# EAGLE board MPC_celltesterV1.0 (EAGLE 9.6.2)
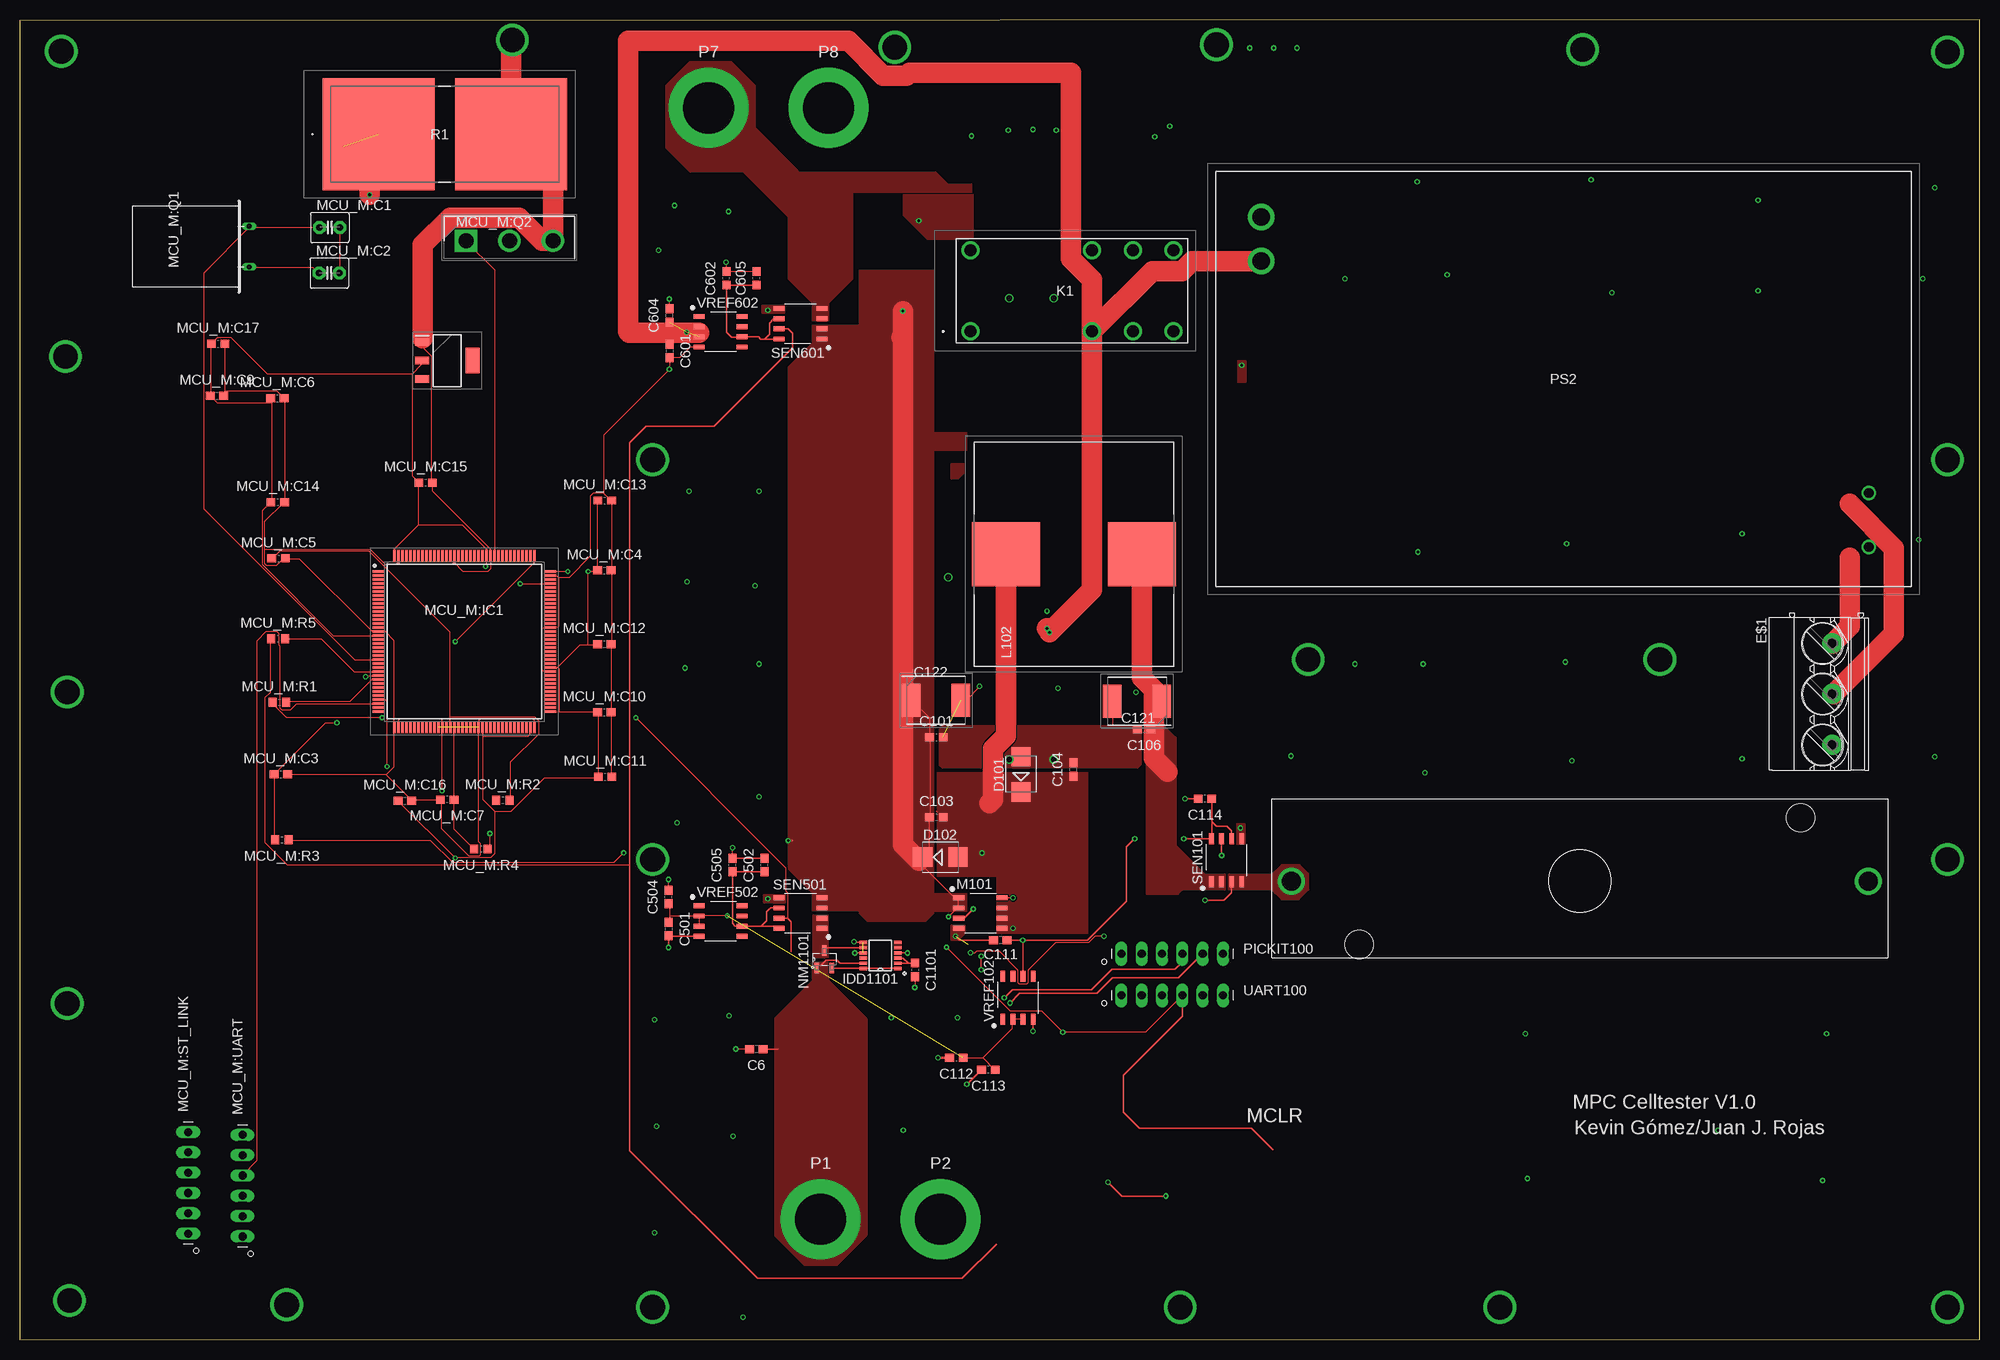
[diagram p0: board, top side]
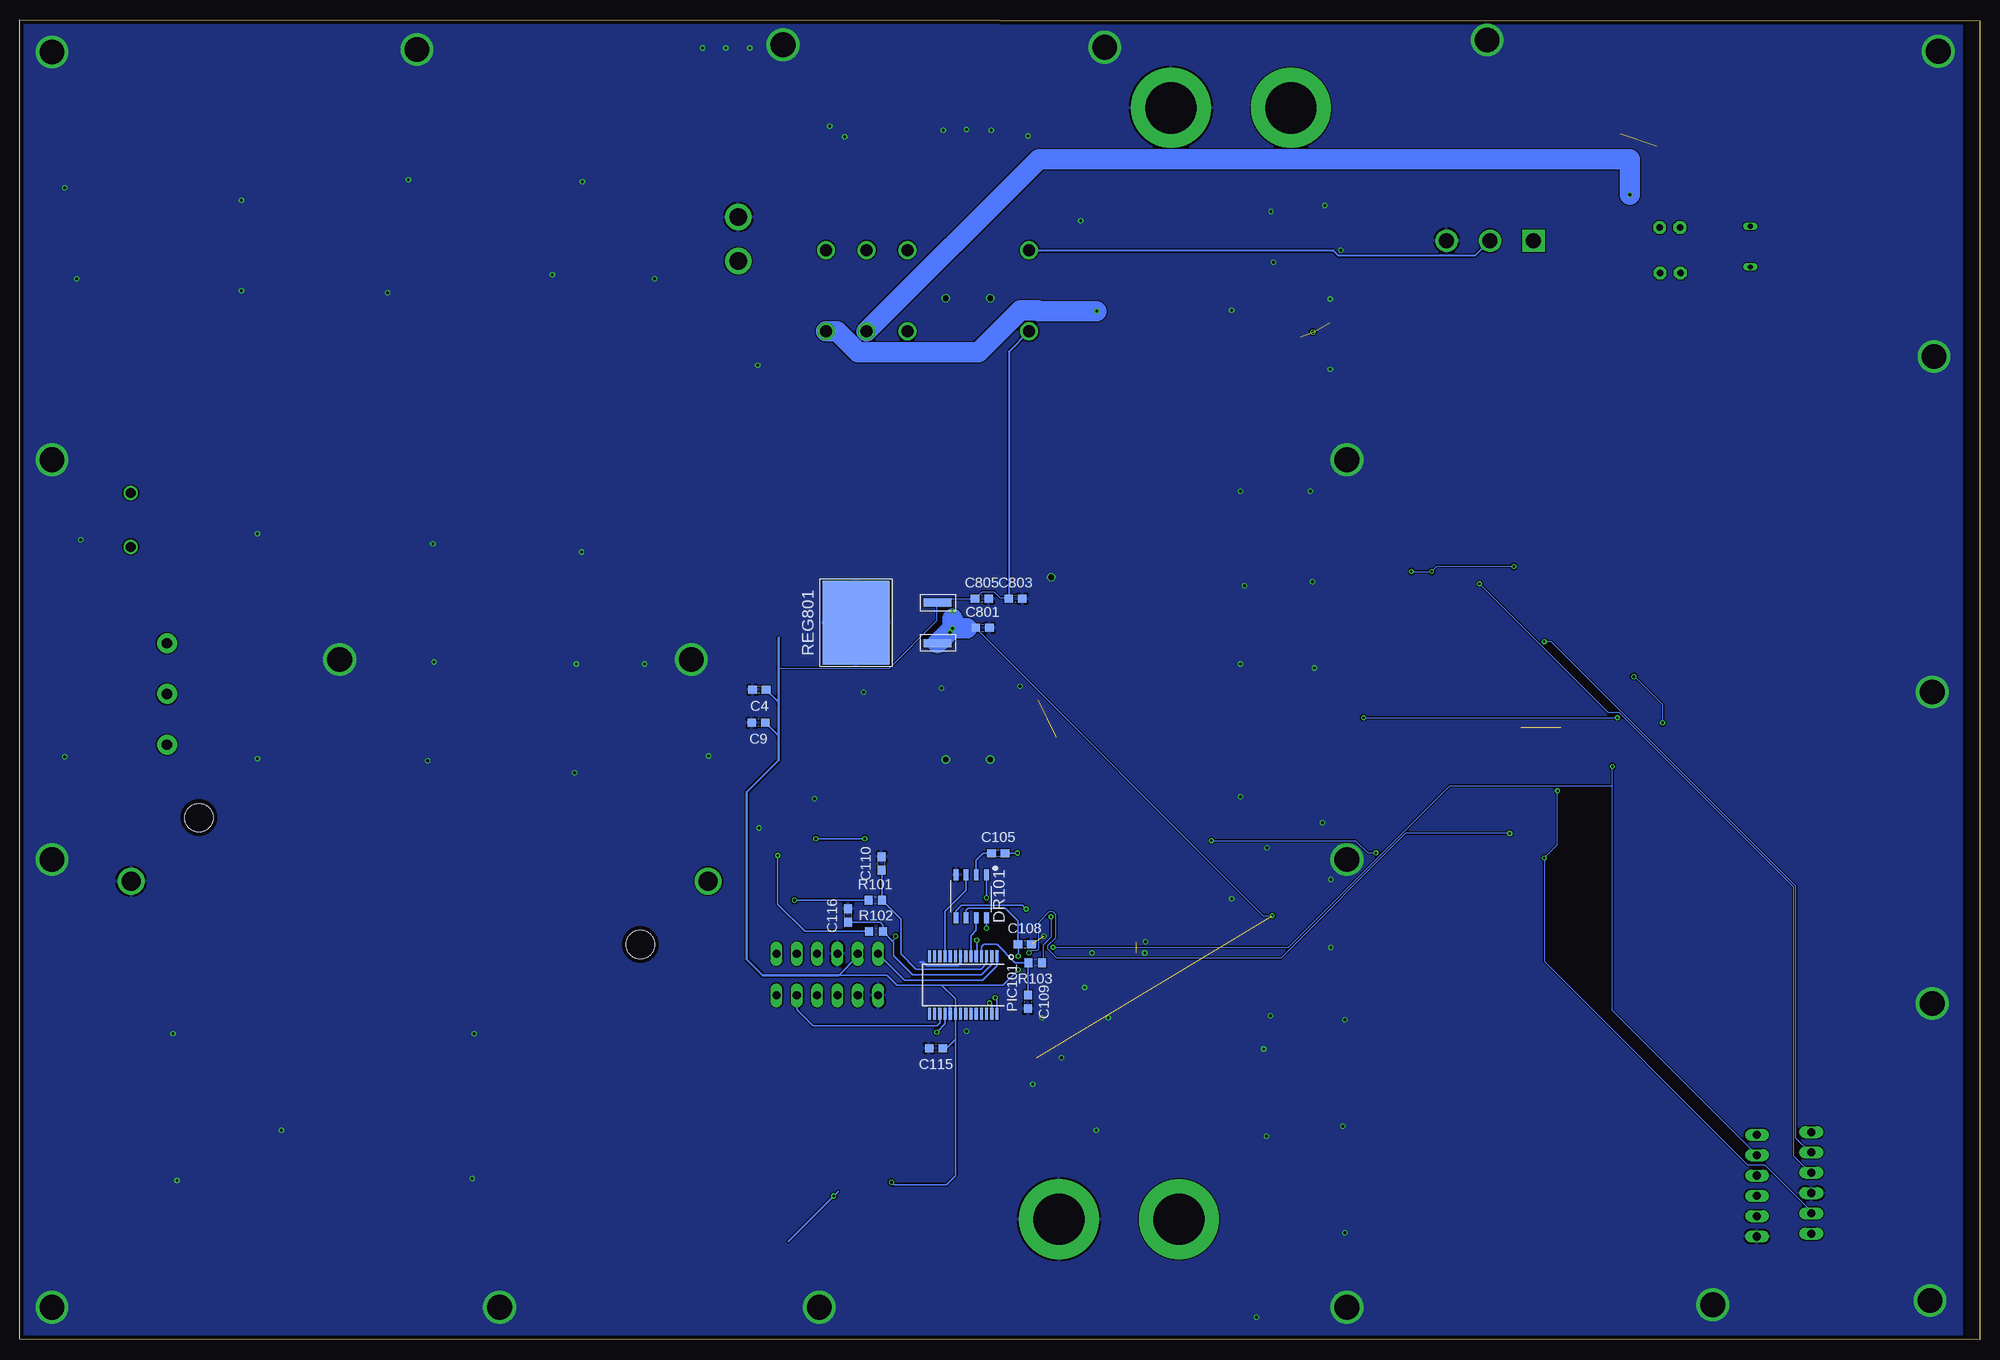
[diagram p1: board, bottom side, seen from below]

Size 245.15 x 165.1 mm. Coordinates in mm from the lower left corner, seen from the top.
Outline: 0,0 245.15,0.1 245.15,165.1 0,165 0,0
Copper layers (1*16): Top 0.035mm / dielectric 1.53mm / Bottom 0.035mm
Design rules "pban_5mil-l2": minimum track width 5mil, minimum drill 0.3mm, track to track 5mil, track to pad 0.229mm, pad to pad 5mil, via to via 5mil, smd to smd 5mil, copper to edge 0.5mm, drill to drill 0.5mm, minimum pad ring 0.15mm, minimum via ring 0.15mm, stop-mask expansion 4mil, vias tented up to drill 0.35mm, thermal gap 10mil

## Footprints (pad centres in the part's own frame; a part is rotated, then mirrored left to right if it is on the bottom)
C0603 = smd 1.1 x 1: 1 -0.85,0; 2 0.85,0
CAPPM7360X430N = smd 2.35 x 4.15: 1 -3.1,0; 2 3.1,0
18650_HOLDER = drill 2.38: BB1.N 36.11,0; BB1.P -36.11,0 | hole 3.55: 27.6,7.935; -27.6,-7.935
SMB = smd 2.4 x 2.4: A 2.2,0; C -2.2,0
SOIC-8 = smd 0.6 x 1.4: 1 -1.905,-2.7; 2 -0.635,-2.7; 3 0.635,-2.7; 4 1.905,-2.7; 5 1.905,2.7; 6 0.635,2.7; 7 -0.635,2.7; 8 -1.905,2.7
MKDS_5/3-635 = drill 1.3 pad 2.5: 1 -6.35,0; 2 0,0; 3 6.35,0
MSOP12 = smd 0.9 x 0.42: 1 -2.163,1.625; 2 -2.163,0.975; 3 -2.163,0.325; 4 -2.163,-0.325; 5 -2.163,-0.975; 6 -2.163,-1.625; 7 2.15,-1.625; 8 2.15,-0.975; 9 2.15,-0.325; 10 2.15,0.325; 11 2.15,0.975; 12 2.15,1.625
ADJ56005 = drill 1.5 pad 2.25: 1 0,0; 2 15.24,0; 3 20.32,0; 4 25.4,0; 5 25.4,10.16; 6 20.32,10.16; 7 15.24,10.16; 8 0,10.16
74437529203221 = smd 8 x 8.5: 1 0,8.5; 2 0,-8.5
C2.5-4 = drill 0.813 pad 1.6 octagon: 1 -1.27,0; 2 1.27,0
QFP50P2200X2200X160-144N = smd 1.475 x 0.3: 1 -10.738,8.75; 2 -10.738,8.25; 3 -10.738,7.75; 4 -10.738,7.25; 5 -10.738,6.75; 6 -10.738,6.25; 7 -10.738,5.75; 8 -10.738,5.25; 9 -10.738,4.75; 10 -10.738,4.25; 11 -10.738,3.75; 12 -10.738,3.25; 13 -10.738,2.75; 14 -10.738,2.25; 15 -10.738,1.75; 16 -10.738,1.25; 17 -10.738,0.75; 18 -10.738,0.25; 19 -10.738,-0.25; 20 -10.738,-0.75; 21 -10.738,-1.25; 22 -10.738,-1.75; 23 -10.738,-2.25; 24 -10.738,-2.75; 25 -10.738,-3.25; 26 -10.738,-3.75; 27 -10.738,-4.25; 28 -10.738,-4.75; 29 -10.738,-5.25; 30 -10.738,-5.75; 31 -10.738,-6.25; 32 -10.738,-6.75; 33 -10.738,-7.25; 34 -10.738,-7.75; 35 -10.738,-8.25; 36 -10.738,-8.75; 73 10.738,-8.75; 74 10.738,-8.25; 75 10.738,-7.75; 76 10.738,-7.25; 77 10.738,-6.75; 78 10.738,-6.25; 79 10.738,-5.75; 80 10.738,-5.25; 81 10.738,-4.75; 82 10.738,-4.25; 83 10.738,-3.75; 84 10.738,-3.25; 85 10.738,-2.75; 86 10.738,-2.25; 87 10.738,-1.75; 88 10.738,-1.25; 89 10.738,-0.75; 90 10.738,-0.25; 91 10.738,0.25; 92 10.738,0.75; 93 10.738,1.25; 94 10.738,1.75; 95 10.738,2.25; 96 10.738,2.75; 97 10.738,3.25; 98 10.738,3.75; 99 10.738,4.25; 100 10.738,4.75; 101 10.738,5.25; 102 10.738,5.75; 103 10.738,6.25; 104 10.738,6.75; 105 10.738,7.25; 106 10.738,7.75; 107 10.738,8.25; 108 10.738,8.75 | smd 0.3 x 1.475: 37 -8.75,-10.738; 38 -8.25,-10.738; 39 -7.75,-10.738; 40 -7.25,-10.738; 41 -6.75,-10.738; 42 -6.25,-10.738; 43 -5.75,-10.738; 44 -5.25,-10.738; 45 -4.75,-10.738; 46 -4.25,-10.738; 47 -3.75,-10.738; 48 -3.25,-10.738; 49 -2.75,-10.738; 50 -2.25,-10.738; 51 -1.75,-10.738; 52 -1.25,-10.738; 53 -0.75,-10.738; 54 -0.25,-10.738; 55 0.25,-10.738; 56 0.75,-10.738; 57 1.25,-10.738; 58 1.75,-10.738; 59 2.25,-10.738; 60 2.75,-10.738; 61 3.25,-10.738; 62 3.75,-10.738; 63 4.25,-10.738; 64 4.75,-10.738; 65 5.25,-10.738; 66 5.75,-10.738; 67 6.25,-10.738; 68 6.75,-10.738; 69 7.25,-10.738; 70 7.75,-10.738; 71 8.25,-10.738; 72 8.75,-10.738; 109 8.75,10.738; 110 8.25,10.738; 111 7.75,10.738; 112 7.25,10.738; 113 6.75,10.738; 114 6.25,10.738; 115 5.75,10.738; 116 5.25,10.738; 117 4.75,10.738; 118 4.25,10.738; 119 3.75,10.738; 120 3.25,10.738; 121 2.75,10.738; 122 2.25,10.738; 123 1.75,10.738; 124 1.25,10.738; 125 0.75,10.738; 126 0.25,10.738; 127 -0.25,10.738; 128 -0.75,10.738; 129 -1.25,10.738; 130 -1.75,10.738; 131 -2.25,10.738; 132 -2.75,10.738; 133 -3.25,10.738; 134 -3.75,10.738; 135 -4.25,10.738; 136 -4.75,10.738; 137 -5.25,10.738; 138 -5.75,10.738; 139 -6.25,10.738; 140 -6.75,10.738; 141 -7.25,10.738; 142 -7.75,10.738; 143 -8.25,10.738; 144 -8.75,10.738
SOT230P700X180-4N = smd 1.75 x 0.95: 1 -3.15,2.3; 2 -3.15,0; 3 -3.15,-2.3 | smd 1.75 x 3.2: 4 3.15,0
Q = drill 0.61 long: 1 -2.54,-7.62; 2 2.54,-7.62
TO544P530X1590X2600-3P = drill 1.86 pad 2.79 square: 1 0,0 | drill 1.86 pad 2.79: 2 5.44,0; 3 10.88,0
R0603 = smd 1 x 1.1: 1 -0.85,0; 2 0.85,0
MA06-1 = drill 1.016 long: 1 -6.35,0; 2 -3.81,0; 3 -1.27,0; 4 1.27,0; 5 3.81,0; 6 6.35,0
SOT-23 = smd 1.321 x 0.559: 1 -1.092,0.94; 2 -1.092,-0.94; 3 1.092,0
TJ-563 = drill 6.4 pad 10: P 0,0
SSOP28 = smd 0.4 x 1.5: 1 -4.225,-3.625; 2 -3.575,-3.625; 3 -2.925,-3.625; 4 -2.275,-3.625; 5 -1.625,-3.625; 6 -0.975,-3.625; 7 -0.325,-3.625; 8 0.325,-3.625; 9 0.975,-3.625; 10 1.625,-3.625; 11 2.275,-3.625; 12 2.925,-3.625; 13 3.575,-3.625; 14 4.225,-3.625; 15 4.225,3.625; 16 3.575,3.625; 17 2.925,3.625; 18 2.275,3.625; 19 1.625,3.625; 20 0.975,3.625; 21 0.325,3.625; 22 -0.325,3.625; 23 -0.975,3.625; 24 -1.625,3.625; 25 -2.275,3.625; 26 -2.925,3.625; 27 -3.575,3.625; 28 -4.225,3.625
MPM9012 = drill 1.2 pad 1.8: 1 0,0; 2 0,-6.75 | drill 2.2 pad 3.3: 3 76,-41.25; 4 76,-35.75
RWS108K2JTR = smd 14 x 14: 1 -8.3,0; 2 8.3,0
D2PAK-3 = smd 1.016 x 3.504: 1 -2.54,-10.213; 3 2.54,-10.213 | smd 10.49 x 8.38: 4 0,0

## Placement (x,y rotation side)
C4  0.1u  [C0603]  152.65,81.3 180 bottom
C6  1u  [C0603]  92.13,36.38 180 top
C9  10u  [C0603]  152.75,77.2 180 bottom
C101  1u  [C0603]  114.65,75.4 0 top
C103  1n  [C0603]  114.65,65.4 0 top
C104  1n  [C0603]  131.8,71.35 90 top
C105  1u  [C0603]  122.75,60.9 0 bottom
C106  1u  [C0603]  140.65,76.4 180 top
C108  2.2u  [C0603]  119.45,49.5 0 bottom
C109  0.1u  [C0603]  119.05,42.3 270 bottom
C110  0.1u  [C0603]  137.35,59.6 90 bottom
C111  1u  [C0603]  122.65,50 180 top
C112  10u  [C0603]  117.15,35.3 180 top
C113  1u  [C0603]  121.15,33.8 180 top
C114  0.1u  [C0603]  148.25,67.7 180 top
C115  0.1u  [C0603]  130.55,36.5 180 bottom
C116  1n  [C0603]  141.55,53.1 90 bottom
C121  T543O477M016AHE020  [CAPPM7360X430N]  139.75,79.9 180 top
C122  T543O477M016AHE020  [CAPPM7360X430N]  114.6,80 0 top
C501  10u  [C0603]  81.15,51.4 270 top
C502  1u  [C0603]  93.15,59.4 90 top
C504  1u  [C0603]  81.15,55.4 90 top
C505  0.1u  [C0603]  89.15,59.4 90 top
C601  10u  [C0603]  81.25,123.7 270 top
C602  1u  [C0603]  88.37,132.8 90 top
C604  1u  [C0603]  81.27,128.15 90 top
C605  0.1u  [C0603]  92.17,132.8 90 top
C801  0.33u  [C0603]  124.72,89.06 0 bottom
C803  1u  [C0603]  120.61,92.73 0 bottom
C805  10u  [C0603]  124.81,92.73 0 bottom
C1101  0.1u  [C0603]  111.95,46.3 270 top
CELL1  CELL18650_HOLDER  [18650_HOLDER]  195.15,57.4 0 top
D101  [SMB]  125.25,70.75 90 top
D102  [SMB]  115.15,60.4 0 top
DR101  TPS28225D  [SOIC-8]  126.15,55.5 180 bottom
E$1  [MKDS_5/3-635]  226.75,80.8 270 top
IDD1101  LTC4352CMS  [MSOP12]  107.65,48.1 180 top
K1  ADJ56005  [ADJ56005]  118.9,126.15 0 top
L102  74437529203471  [74437529203221]  131.85,98.3 90 top
M101  SI4914BDY  [SOIC-8]  120.15,53.4 270 top
MCU_M:C1  22pF  [C2.5-4]  38.75,139.15 0 top
MCU_M:C2  22pF  [C2.5-4]  38.7,133.45 0 top
MCU_M:C3  0.1u  [C0603]  32.65,70.75 0 top
MCU_M:C4  1u  [C0603]  73.1,96.25 0 top
MCU_M:C5  0.1u  [C0603]  32.35,97.75 0 top
MCU_M:C6  1u  [C0603]  32.2,117.8 0 top
MCU_M:C7  1n  [C0603]  53.45,67.6 180 top
MCU_M:C9  1u  [C0603]  24.65,118.1 0 top
MCU_M:C10  1u  [C0603]  73.1,78.5 0 top
MCU_M:C11  1u  [C0603]  73.2,70.45 0 top
MCU_M:C12  1u  [C0603]  73.1,87.05 0 top
MCU_M:C13  1u  [C0603]  73.15,105 0 top
MCU_M:C14  1u  [C0603]  32.25,104.8 0 top
MCU_M:C15  1u  [C0603]  50.75,107.25 0 top
MCU_M:C16  1u  [C0603]  48.15,67.45 0 top
MCU_M:C17  1u  [C0603]  24.8,124.6 0 top
MCU_M:IC1  STM32U575ZIT6Q  [QFP50P2200X2200X160-144N]  55.6,87.35 0 top
MCU_M:IC2  REG1117-3.3  [SOT230P700X180-4N]  53.45,122.5 0 top
MCU_M:Q1  [Q]  21.05,136.75 90 top
MCU_M:Q2  IMW65R083M1HXKSA1  [TO544P530X1590X2600-3P]  55.8,137.5 0 top
MCU_M:R1  0  [R0603]  32.45,79.75 0 top
MCU_M:R2  200  [R0603]  60.4,67.5 0 top
MCU_M:R3  200  [R0603]  32.75,62.55 180 top
MCU_M:R4  0  [R0603]  57.65,61.4 180 top
MCU_M:R5  0  [R0603]  32.3,87.7 0 top
MCU_M:ST_LINK  [MA06-1]  21.05,19.65 90 top
MCU_M:UART  [MA06-1]  27.85,19.3 90 top
NM1101  IRLML6244TRPBF  [SOT-23]  100.65,47.6 90 top
P1  TJ-563  [TJ-563]  100.15,15.1 0 top
P2  TJ-563  [TJ-563]  115.15,15.1 0 top
P7  TJ-563  [TJ-563]  86.15,154.1 0 top
P8  TJ-563  [TJ-563]  101.15,154.1 0 top
PIC101  PIC16F1786-I/SS  [SSOP28]  127.15,44.4 180 bottom
PICKIT100  [MA06-1]  144.15,48.3 0 top
PS2  MPM-90-12  [MPM9012]  231.3,99.2 180 top
R1  RWS10_8K2_J_T_R  [RWS108K2JTR]  53.15,150.8 0 top
R101  200  [R0603]  138.15,55 0 bottom
R102  0  [R0603]  138.05,51.1 0 bottom
R103  200  [R0603]  118.15,47.2 180 bottom
REG801  NCV7805BD2TG  [D2PAK-3]  140.56,89.7 90 bottom
SEN101  ACS723-05AB-T  [SOIC-8]  150.95,60 0 top
SEN501  ACS723-05AB-T  [SOIC-8]  97.65,53.4 90 top
SEN601  ACS723-05AB-T  [SOIC-8]  97.65,127.1 90 top
UART100  [MA06-1]  144.15,43.1 0 top
VREF102  REF195GSZ  [SOIC-8]  124.85,42.8 0 top
VREF502  REF195GSZ  [SOIC-8]  87.65,52.4 270 top
VREF602  REF195GSZ  [SOIC-8]  87.65,126.1 270 top

## Library data of the parts
C4 C6 C9 C101 C103-C106 C108-C116 C501 C502 C504 C505 C601 C602 C604 C605 C801 C803 C805 C1101 D101 D102 MCU_M:C3-MCU_M:C7 MCU_M:C9-MCU_M:C17 MCU_M:R1-MCU_M:R5 R101-R103 = Pasives
C121 C122 = T543O477M016AHE020; ARROW_PART_NUMBER: T543O477M016AHE020; ARROW_PRICE-STOCK: https://www.arrow.com/en/products/t543o477m016ahe020/kemet-corporation; DESCRIPTION: T543 HRA, Tantalum, Polymer Tantalum, HRA, 470 uF, 20%, 16 VDC, 105C, -55C, 105C, SMD, Polymer, Molded, Up Screening, 10 % , N/A, 20 mOhms, 752 uA, 696 mg, 7360, 4mm, Height Max = 4.3mm, 250, 52 Weeks; HEIGHT: 4.3mm; MANUFACTURER_NAME: KEMET; MANUFACTURER_PART_NUMBER: T543O477M016AHE020; MOUSER_PART_NUMBER: 80-T543O477M016AHE20; MOUSER_PRICE-STOCK: https://www.mouser.co.uk/ProductDetail/KEMET/T543O477M016AHE020/?qs=r5DSvlrkXmJq%252BXsyQPO%252BEg%3D%3D
CELL1 = Sources
DR101 IDD1101 M101 PIC101 REG801 SEN101 SEN501 SEN601 VREF102 VREF502 VREF602 = ICs
E$1 = con-phoenix-mkds_5
K1 = ADJ56005; ARROW_PART_NUMBER: ADJ56005; ARROW_PRICE-STOCK: https://www.arrow.com/en/products/adj56005/panasonic; DESCRIPTION: General Purpose Relays 2 Form C, 5VDC Single-Side-Stable; HEIGHT: 16.8mm; MANUFACTURER_NAME: Panasonic; MANUFACTURER_PART_NUMBER: ADJ56005; MOUSER_PART_NUMBER: 769-ADJ56005; MOUSER_PRICE-STOCK: https://www.mouser.co.uk/ProductDetail/Panasonic-Industrial-Devices/ADJ56005?qs=K19snyAz2PDLYPJLi5JsPw%3D%3D
L102 = 74437529203471; DESCRIPTION: WURTH ELEKTRONIK - 74437529203471 - Power Inductor (SMD), 470 H, 5.5 A, Shielded, 3.7 A, WE-HCF Series, 28mm x 25mm x 20.5mm; HEIGHT: 20.5mm; MANUFACTURER_NAME: Wurth Elektronik; MANUFACTURER_PART_NUMBER: 74437529203471; MOUSER_PART_NUMBER: 710-74437529203471; MOUSER_PRICE-STOCK: https://www.mouser.co.uk/ProductDetail/Wurth-Elektronik/74437529203471?qs=f9yNj16SXrIPviz1ofhdNA%3D%3D
MCU_M:C1 MCU_M:C2 = capacitor-wima
MCU_M:IC1 = STM32U575ZIT6Q; DESCRIPTION: ARM Microcontrollers - MCU Ultra-low-power FPU Arm Cortex-M33 Trust Zone, MCU 160 MHz 2Mbytes Flash memory; HEIGHT: 1.6mm; MANUFACTURER_NAME: STMicroelectronics; MANUFACTURER_PART_NUMBER: STM32U575ZIT6Q; MOUSER_PART_NUMBER: 511-STM32U575ZIT6Q; MOUSER_PRICE-STOCK: https://www.mouser.co.uk/ProductDetail/STMicroelectronics/STM32U575ZIT6Q?qs=DRkmTr78QAQiyS5FForRwQ%3D%3D
MCU_M:IC2 = REG1117-3.3; ARROW_PART_NUMBER: REG1117-3.3; ARROW_PRICE-STOCK: https://www.arrow.com/en/products/reg1117-3.3/texas-instruments?region=nac; DESCRIPTION: 800mA,3.3V,LDO Voltage Reg.,REG1117-3.3 Texas Instruments REG1117-3.3, LDO Voltage Regulator, 0.8A, 3.3 V +/-1%, 3.8 15 Vin, 4-Pin SOT-223; HEIGHT: 1.8mm; MANUFACTURER_NAME: Texas Instruments; MANUFACTURER_PART_NUMBER: REG1117-3.3; MOUSER_PART_NUMBER: 595-REG1117-3.3; MOUSER_PRICE-STOCK: https://www.mouser.co.uk/ProductDetail/Texas-Instruments/REG1117-3.3?qs=sSOk4GDDv7y9bL0tER%2FZXw%3D%3D
MCU_M:Q1 = special
MCU_M:Q2 = IMW65R083M1HXKSA1; DESCRIPTION: CoolSiC MOSFET 650V SiC MOSFET delivering reliable and cost-effective performance in TO247 3pin package; HEIGHT: 5.3mm; MANUFACTURER_NAME: Infineon; MANUFACTURER_PART_NUMBER: IMW65R083M1HXKSA1; MOUSER_PART_NUMBER: 726-IMW65R083M1HXKSA; MOUSER_PRICE-STOCK: https://www.mouser.co.uk/ProductDetail/Infineon-Technologies/IMW65R083M1HXKSA1?qs=iLbezkQI%252Bshnhe4LfuFU5w%3D%3D
MCU_M:ST_LINK MCU_M:UART PICKIT100 UART100 = Interfaces; OC_FARNELL: unknown; OC_NEWARK: unknown
NM1101 = ICs; RS_SN: 737-7228
P1 P2 P7 P8 = Interfaces
PS2 = MPM-90-12; ARROW_PART_NUMBER: MPM-90-12; ARROW_PRICE-STOCK: https://www.arrow.com/en/products/mpm-90-12/mean-well-enterprises; DESCRIPTION: AC/DC Power Modules 80.4W 12V 6.7A PCB Mnt Medical; HEIGHT: 29.5mm; MANUFACTURER_NAME: Mean Well; MANUFACTURER_PART_NUMBER: MPM-90-12; MOUSER_PART_NUMBER: 709-MPM-90-12; MOUSER_PRICE-STOCK: https://www.mouser.co.uk/ProductDetail/MEAN-WELL/MPM-90-12?qs=GBLSl2AkirsaepJLNG9d8w%3D%3D
R1 = RWS10_8K2_J_T&R; DESCRIPTION: Precision Power Wirewound SMD Resistors; HEIGHT: 13mm; MANUFACTURER_NAME: Arcol; MANUFACTURER_PART_NUMBER: RWS10 8K2 J T&R

## Nets
+5V: C4.1 C9.1 C108.1 C115.1 C803.1 C805.1 DR101.6 K1.1 PIC101.20 PICKIT100.2 REG801.3
+12V: C112.1 C113.1 C501.1 C504.1 C601.1 C604.1 C801.1 K1.2 PS2.4 REG801.1 VREF102.2 VREF102.3 VREF502.2 VREF502.3 VREF602.2 VREF602.3
COM_RX: MCU_M:IC1.33 MCU_M:UART.5 PIC101.18 UART100.4
GND: C4.2 C6.2 C9.2 C101.2 C104.2 C106.2 C108.2 C109.2 C110.2 C111.2 C112.2 C113.2 C114.2 C115.2 C116.2 C121.2 C122.2 C501.2 C502.2 C504.2 C505.2 C601.2 C602.2 C604.2 C605.2 C801.2 C803.2 C805.2 C1101.2 CELL1.BB1.N D101.A DR101.4 IDD1101.4 IDD1101.7 IDD1101.9 M101.4 MCU_M:C3.2 MCU_M:C4.2 MCU_M:C5.2 MCU_M:C6.2 MCU_M:C7.2 MCU_M:C9.2 MCU_M:C10.2 MCU_M:C11.2 MCU_M:C12.2 MCU_M:C13.2 MCU_M:C14.2 MCU_M:C15.2 MCU_M:C16.2 MCU_M:C17.2 MCU_M:IC1.16 MCU_M:IC1.37 MCU_M:IC1.48 MCU_M:IC1.58 MCU_M:IC1.72 MCU_M:IC1.83 MCU_M:IC1.94 MCU_M:IC1.107 MCU_M:IC1.120 MCU_M:IC1.129 MCU_M:IC1.143 MCU_M:IC2.1 MCU_M:Q2.3 MCU_M:ST_LINK.3 MCU_M:UART.1 P2.P P8.P PIC101.8 PIC101.19 PICKIT100.3 PS2.3 R1.2 REG801.4 SEN101.5 SEN501.5 SEN601.5 UART100.1 VREF102.4 VREF502.4 VREF602.4
I_BAT: R102.1 SEN101.7
IDEAL_D1:N$1: IDD1101.1 IDD1101.12 NM1101.2
IDEAL_D1:N$4: C1101.1 IDD1101.2 IDD1101.3
IS_LOAD: MCU_M:R5.1 SEN601.7
IS_PV: MCU_M:R1.1 SEN501.7
LOAD_BUS: P7.P SEN601.3 SEN601.4
MCU_M:3.3V_IN: MCU_M:C4.1 MCU_M:C6.1 MCU_M:C9.1 MCU_M:C10.1 MCU_M:C11.1 MCU_M:C12.1 MCU_M:C13.1 MCU_M:C14.1 MCU_M:C15.1 MCU_M:C16.1 MCU_M:C17.1 MCU_M:IC1.17 MCU_M:IC1.38 MCU_M:IC1.49 MCU_M:IC1.59 MCU_M:IC1.71 MCU_M:IC1.73 MCU_M:IC1.84 MCU_M:IC1.108 MCU_M:IC1.121 MCU_M:IC1.144 MCU_M:IC2.2 MCU_M:ST_LINK.2
MCU_M:+12V: MCU_M:IC2.3
MCU_M:BAT: MCU_M:R2.1
MCU_M:I_BAT: MCU_M:R4.1
MCU_M:I_LOAD: MCU_M:IC1.26 MCU_M:R5.2
MCU_M:I_PV: MCU_M:IC1.28 MCU_M:R1.2
MCU_M:IS_BATC: MCU_M:C7.1 MCU_M:IC1.52 MCU_M:R4.2
MCU_M:N$20: MCU_M:C1.1 MCU_M:IC1.23 MCU_M:Q1.2
MCU_M:N$21: MCU_M:C2.1 MCU_M:Q1.1
MCU_M:N$22: MCU_M:C1.2 MCU_M:C2.2
MCU_M:N$27: MCU_M:IC1.119 MCU_M:Q2.1
MCU_M:RX: MCU_M:IC1.34 MCU_M:UART.4
MCU_M:SW_CLK: MCU_M:IC1.109 MCU_M:ST_LINK.5
MCU_M:SW_DIO: MCU_M:IC1.105 MCU_M:ST_LINK.4
MCU_M:V_BUS: MCU_M:C3.1 MCU_M:IC1.27 MCU_M:R3.2
MCU_M:VS_BATC: MCU_M:C5.1 MCU_M:IC1.51 MCU_M:R2.2
MCU_S1:5V_REF: C111.1 C114.1 PIC101.5 SEN101.6 SEN101.8 VREF102.6
MCU_S1:DR_EN: DR101.7 PIC101.6
MCU_S1:G1: DR101.1 M101.8
MCU_S1:G2: DR101.5 M101.3
MCU_S1:ICSPCLK: PIC101.27 PICKIT100.5
MCU_S1:ICSPDAT: PIC101.28 PICKIT100.4
MCU_S1:IS_BAT: C116.1 PIC101.2 R102.2
MCU_S1:LO: C106.1 C121.1 L102.2 SEN101.1 SEN101.2
MCU_S1:MCLR: PIC101.1 PICKIT100.1
MCU_S1:N$2: C105.1 DR101.2
MCU_S1:PWM: DR101.3 PIC101.11
MCU_S1:SW: C103.2 C104.1 C105.2 D101.C D102.A DR101.8 L102.1 M101.5 M101.6 M101.7
MCU_S1:TX: PIC101.17 UART100.5
MCU_S1:VS_BAT: C110.1 PIC101.3 R101.2
MCU_S1:VS_BUS: C109.1 PIC101.4 R103.2
N$1: CELL1.BB1.P R101.1 SEN101.3 SEN101.4
N$2: K1.3 R1.1
N$6: IDD1101.8 NM1101.3 SEN501.1 SEN501.2
PV: C6.1 IDD1101.11 NM1101.1 P1.P
PV_BUS: C101.1 C103.1 C122.1 D102.C K1.4 M101.1 M101.2 MCU_M:R3.1 R103.1 SEN501.3 SEN501.4 SEN601.1 SEN601.2
SENS_LOAD:5V_REF: C602.1 C605.1 SEN601.6 SEN601.8 VREF602.6
SENS_PV:5V_REF: C502.1 C505.1 SEN501.6 SEN501.8 VREF502.6
TX_RELAY: K1.8 MCU_M:Q2.2

## Tracks (layer width: path | path; a pad name or v marks a point on that pad's centre or on a via)
+5V  (via drill 0.35)
  Top 0.2: v120.25,48 v120.25,46.3 | v143.35,18 137.85,18 v136.12,19.73
  Bottom 0.127: 121.42,92.77 C803.1 121.5,92.81 122.52,92.81 123.28,93.57 124.81,93.57 125.57,92.81 C805.1 125.7,92.68 129.89,92.68 130.27,92.3 REG801.3 130.4,92.17 130.4,90.02 136.36,84.05 150.25,84.05
  Bottom 0.2: DR101.6 126.78,53.77 126.55,54 121.85,54 120.3,52.45 C108.1 120.25,49.45 v120.25,48 | v120.25,46.3 122.15,44.4 129.85,44.4 | 142.69,45.65 140.34,48 PICKIT100.2 | 129.85,44.4 128.12,42.68 PIC101.20 128.12,37.6 | 129.85,44.4 135.45,44.4 136.69,45.65 142.69,45.65 | C4.1 150.25,79.75 150.25,79.5 | C9.1 150.25,75.55 150.25,75.3 | 142.75,18.59 v143.35,17.99 v143.35,18 149.04,12.31 | 142.74,45.6 142.69,45.65 | 128.12,37.6 128.12,20.53 129.25,19.4 135.8,19.4 v136.12,19.73 | C115.1 129.23,36.5 128.12,37.6
  Bottom 0.254: K1.1 121.42,123.63 121.42,92.77
  Bottom 0.3: 150.25,87.83 150.25,84.05 150.25,79.5 150.25,75.3 150.25,72.5 154.25,68.5 154.25,47.6 152.25,45.6 142.74,45.6
+12V  (via drill 0.3, 0.35)  (3 unrouted)
  Top 0.127: VREF502.3 84.93,51.79 84.93,52.93 VREF502.2 | 81.25,53.06 81.25,54.46 C504.1 | 81.25,53.06 81.25,52.3 C501.1 | 81.25,53.06 84.93,53.06 VREF502.2 | v88.49,53.06 85.06,53.06 VREF502.2 | C601.1 81.25,125.45 84.93,125.45 VREF602.3 84.93,125.58 84.93,126 84.93,126.72 VREF602.2 85.06,126.85 85.31,126.85 | 81.25,127.23 C604.1 | 134.08,126.21 K1.2 134.21,126.21 | 155.25,134.83 PS2.4 | VREF102.3 125.44,40.11 124.3,40.11 VREF102.2 124.17,39.98 124.17,38.96 120.49,35.28 | 120.49,35.28 121.89,33.88 C113.1 | 120.49,35.28 118.08,35.28 C112.1
  Top 2.54: PS2.4 146.65,134.95 145.39,133.69 141.68,133.69 134.21,126.21 | v128.49,89 128.8,88.69 v128.8,88.5 134.14,93.84 K1.2 134.14,132.6 131.52,135.22 131.52,158.48 131.5,158.5 111.27,158.5 110.92,158.15 107.98,158.15 103.63,162.5 76.05,162.5 76.05,126.15 76.2,126 84.93,126
  Bottom 0.127: v128.49,89 128.45,89 126.65,89 125.7,89 C801.1 125.57,89 89.63,53.06 v88.49,53.06 | 130.27,87.22 REG801.1 | 128.49,90.23 v128.49,91.16
  Bottom 2.54: REG801.1 128.51,89 128.45,89 | 126.65,89 v128.49,89 128.49,90.23
  other vias: 83.4,126.05
COM_RX  (via drill 0.3, 0.35)
  Top 0.127: v45.94,71.73 45.94,79.86 45.69,80.11 44.92,80.11 MCU_M:IC1.33 | v115.92,49.12 123.92,41.12 127.86,41.12 130.4,38.58 130.44,38.51 v130.45,38.5
  Top 0.152: UART100.4 140.83,38.51 130.44,38.51
  Top 0.2: UART100.4 145.45,43.07 145.45,40.5 138.07,33.12 138.07,28.5 140.07,26.5 154.05,26.5 156.76,23.79
  Bottom 0.127: 45.94,69.31 45.94,41.25 27.91,23.21 MCU_M:UART.5 | 45.94,69.31 v45.94,71.73 | 45.94,69.31 66.26,69.31 86.45,49.12 v115.92,49.12
  Bottom 0.2: PIC101.18 129.43,39.52 v130.45,38.5
GND  (via drill 0.35, 0.7, 3.1 pad 4.1)  (4 unrouted)
  Top 0.127: 47.34,97.25 47.34,98.02 MCU_M:IC1.143 | 47.34,97.25 47.59,97 54.07,97 54.32,97.25 | 54.32,97.25 54.32,98.02 MCU_M:IC1.129 | 54.32,97.25 55.47,96.11 58.51,96.11 58.89,96.49 58.89,98.02 MCU_M:IC1.120 58.89,98.14 58.89,98.91 51.66,106.14 51.66,107.16 MCU_M:C15.2 51.53,107.29 51.53,123.04 50.39,124.18 50.39,124.69 MCU_M:IC2.1 50.39,124.81 50.39,125.3 | 30.57,98.91 30.57,102.33 32.99,104.75 MCU_M:C14.2 33.11,104.88 33.11,117.7 MCU_M:C6.2 32.99,117.83 32.1,118.72 25.62,118.72 | 30.57,98.91 30.57,97.13 30.83,96.87 32.1,96.87 32.86,97.64 33.11,97.64 MCU_M:C5.2 33.24,97.64 35.02,97.64 44.04,88.62 44.8,88.62 MCU_M:IC1.16 44.92,88.62 45.69,88.62 46.83,87.48 46.83,76.68 MCU_M:IC1.37 46.83,76.55 46.83,71.73 45.81,70.71 | 25.62,118.72 25.62,124.56 MCU_M:C17.2 | 25.62,118.72 25.62,118.21 MCU_M:C9.2 | MCU_M:IC1.72 64.36,76.68 64.36,77.44 64.1,77.7 57.62,77.7 57.37,77.44 57.37,76.68 MCU_M:IC1.58 57.37,76.55 57.37,62.33 57.62,62.08 57.62,60.68 57.5,60.55 56.1,60.55 52.67,63.98 52.67,67.54 MCU_M:C7.2 52.54,67.54 49.12,67.54 MCU_M:C16.2 48.99,67.54 45.81,70.71 | 45.81,70.71 33.62,70.71 MCU_M:C3.2 | 47.34,97.25 47.08,97 45.69,97 43.78,98.91 30.57,98.91 | MCU_M:C11.2 74.01,70.46 74.01,78.46 MCU_M:C10.2 74.01,78.59 74.01,86.97 MCU_M:C12.2 74.01,87.09 74.01,96.24 MCU_M:C4.2 74.01,96.37 74.01,104.88 MCU_M:C13.2 73.88,105 72.99,105.89 | 67.4,95.35 67.4,89.25 67.28,89.13 66.39,89.13 MCU_M:IC1.94 | 67.4,95.35 67.15,95.6 66.39,95.6 MCU_M:IC1.107 | 67.4,95.35 68.67,95.35 71.34,98.02 71.34,105.51 71.72,105.89 72.99,105.89 | 136.75,76.8 136.75,79.86 C121.2
  Top 0.127: C122.2 117.82,80.11 118.46,80.11 119.98,81.63 v120.05,81.75 | 61.56,162.53 v61.6,162.6 | 72.99,105.89 72.99,113.13 81.25,121.38 v81.25,121.4
  Top 0.152: C505.2 v89.15,61.55 | 104.45,48.43 v104.45,48.4 | 104.35,49.73 v104.35,49.8 | 111.05,48.43 v111.05,48.4 | C1101.2 v111.95,44.1 | C504.2 v81.15,57.6 | C6.2 89.55,36.38 v89.55,36.4 | C604.2 81.27,130.2 v81.25,130.2 | C605.2 C602.2 88.37,134.8 v88.35,134.8 | VREF602.4 83.84,124.19 82.5,122.85 C601.2 v81.25,121.4 | MCU_M:IC1.83 66.29,83.64 65.47,83.64 65.3,83.82 65.3,88.88 65.35,88.93 65.35,89 65.45,89.1 MCU_M:IC1.94
  Top 0.2: C505.2 C502.2 | VREF502.4 81.21,50.5 C501.2 v81.15,49.1 | IDD1101.9 104.45,48.43 | IDD1101.7 104.35,49.73 | IDD1101.4 111.05,48.43 | VREF102.4 v126.75,38.6 | C114.2 v145.75,67.7 | C111.2 117.55,50 v117.05,50.5
  Top 0.3: C112.2 v114.85,35.3 | C113.2 118.5,32 v118.45,32
  Top 2.54: 61.56,162.53 61.45,162.42 R1.2 66.68,145.57 MCU_M:Q2.3 65.33,137.5 62.44,140.39 53.78,140.39 50.39,137 50.39,125.3
  Bottom 0.127: C116.2 141.57,53.95 141.5,54
  Bottom 0.305: PIC101.8 127.54,47.96 127.54,47.12 127.77,46.89 131.73,46.89 132.09,47.25 132.5,47.25
  other vias: 119.05,150.6 116.15,95.4 123.75,130.3 109.45,161.7 185.15,4.1 79.15,4.1 123.65,151.3 126.75,151.4 129.65,151.3 79.15,110.1 149.7,162 153.85,161.6 156.85,161.6 159.75,161.6 143.85,151.8 141.95,150.5 93.55,55.2 93.55,128.8 112.45,140 129.35,130.3 123.75,72.6 129.35,72.6 152.85,121.9 152.7,64.05 241.15,161.1 241.15,4.1 145.15,4.1 79.15,60.1 241.15,60.1 241.15,110.1 161.15,85.1 205.15,85.1 195.5,161.4 81.9,141.9 88.65,141.15 79.9,136.3 174.8,144.85 165.75,132.75 178.55,133.25 199.15,131 196.55,145.1 217.45,142.55 239.55,144.1 238.05,132.75 217.45,131.25 129.85,81.5 139.6,81 237.55,100.1 215.45,100.85 193.35,84.8 167,84.55 175.55,84.55 215.45,72.7 239.55,72.95 188.35,38.3 188.6,20.2 212.45,26.25 226,38.3 225.5,19.95 110.5,26.25 109,40.3 117.3,40.3 88.7,40.55 79.4,40.05 79.65,26.75 89.2,25.5 79.4,13.4 90.45,2.85 92.45,67.95 82.2,64.7 83.2,84.05 92.45,84.55 91.95,94.35 83.45,94.85 92.45,106.15 83.7,106.15 174.9,98.55 193.5,99.6 175.75,70.95 159,73.05 194.15,72.45 5.15,161.2 6.2,4.95 33.35,4.4 5.9,81.05 5.7,123 5.9,42.1
  pour Bottom (isolate 0.15): 2.25,0.1 2.25,165.1 245.15,165.1 245.15,0.1
  pour Top (isolate 0.15, no thermals): 95.75,54.7 95.75,55.7 93.05,55.7 93.05,54.7
  pour Top (isolate 0.15, no thermals): 95.65,128.4 95.65,129.4 92.85,129.4 92.85,128.4
  pour Top (isolate 0.15, rank 3, no thermals): 110.55,143.9 119.25,143.9 119.25,137.7 113.55,137.7 110.55,140.7
  pour Top (isolate 0.15, rank 2, no thermals): 140.25,76.8 115.45,76.8 115.05,76.4 115.05,71.9 115.4,71.55 139.8,71.55 140.25,72
  pour Top (isolate 0.15, no thermals): 152.35,119.8 152.35,122.5 153.35,122.5 153.35,119.8
  pour Top (isolate 0.15, no thermals): 116.45,109.6 118.25,109.6 118.25,108.6 117.35,107.7 116.45,107.7
  pour Top (isolate 0.15, no thermals): 152.25,62 152.25,64.6 153.25,64.6 153.25,62
  pour Top (isolate 0.15, no thermals): 116.45,51.9 118.25,51.9 118.25,50.9 117.35,50 116.45,50
I_BAT  (via drill 0.35)
  Top 0.2: v150.35,60.6 150.31,60.63 SEN101.7
  Bottom 0.2: R102.1 146.95,51.1 150.35,54.5 v150.35,60.6
IDEAL_D1:N$1
  Top 0.152: 101.62,46.48 NM1101.2
  Top 0.2: 101.62,46.48 IDD1101.12 IDD1101.1
IDEAL_D1:N$4
  Top 0.152: 111.93,47.12 C1101.1
  Top 0.2: IDD1101.2 111.15,47.12 | 111.15,47.12 111.93,47.12 | IDD1101.3 110.5,47.77 111.15,47.12
IS_LOAD
  Top 0.127: MCU_M:R5.1 31.34,87.6 31.34,81 30.7,80.36 30.7,62.2 33.49,59.41 76.27,59.41 76.29,59.41
  Top 0.2: SEN601.7 96.09,126.46 96.65,125.9 96.65,124.1 86.85,114.3 78.35,114.3 76.27,112.22 76.27,59.41 76.27,23.68 92.25,7.7 117.85,7.7 122.15,12
IS_PV  (via drill 0.3)
  Top 0.127: v45.31,77.82 33.37,77.82 31.72,79.47 31.72,79.73 MCU_M:R1.1 | v77.06,77.82 95.85,59.03 95.85,56.11 96.11,55.85 96.11,52.68 96.09,52.66
  Top 0.2: SEN501.7 95.99,52.77 96.09,52.66 96.45,52.3 96.45,48.55
  Bottom 0.127: v77.06,77.82 v45.31,77.82
LOAD_BUS
  pour Top (isolate 0.15, no thermals): 101.15,127.4 99.15,127.4 99.15,129.7 96.15,132.7 96.15,145.7 104.15,145.7 104.15,132.7 101.15,129.7
  pour Top (isolate 0.15, no thermals): 119.05,144.6 119.05,143.5 96.15,143.5 96.15,146.1 114.55,146.1 116.05,144.6
  pour Top (isolate 0.15, no thermals): 90.55,146.1 83.85,146.1 80.85,149.1 80.85,156.9 83.85,159.9 88.95,159.9 91.95,156.9 91.95,151.6 97.35,146.2 97.35,139.3
MCU_M:3.3V_IN  (via drill 0.3)
  Top 0.127: 49.88,101.95 49.88,107.16 MCU_M:C15.1 49.88,107.29 49.12,108.05 49.12,120.88 | 49.88,101.95 46.83,98.91 46.83,98.14 MCU_M:IC1.144 | 49.88,101.95 55.34,101.95 58.39,98.91 58.39,98.14 MCU_M:IC1.121 58.39,98.02 58.39,96.87 v58.26,96.75 | 49.12,120.88 50.26,122.02 50.26,122.4 MCU_M:IC2.2 | 31.46,117.19 31.46,117.7 MCU_M:C6.1 | 31.46,117.19 31.46,104.88 MCU_M:C14.1 31.34,104.75 30.32,103.73 30.32,97 39.21,88.11 44.8,88.11 MCU_M:IC1.17 | 31.46,117.19 24.73,117.19 23.84,118.08 MCU_M:C9.1 23.84,118.21 23.84,124.56 MCU_M:C17.1 23.97,124.69 24.73,125.45 26.38,125.45 30.95,120.88 49.12,120.88 | MCU_M:C13.1 72.23,104.88 72.23,96.37 MCU_M:C4.1 72.23,96.24 72.1,96.11 v71.09,96.11 71.09,86.97 | v68.55,96.11 66.39,96.11 MCU_M:IC1.108 | 71.09,86.97 70.07,86.97 67.28,84.17 | 71.09,86.97 72.23,86.97 MCU_M:C12.1 | 67.28,84.17 67.15,84.05 66.39,84.05 MCU_M:IC1.84 | 67.53,78.59 66.39,78.59 MCU_M:IC1.73 | 67.53,78.59 72.23,78.59 MCU_M:C10.1 72.36,78.46 MCU_M:C11.1 72.23,70.33 65.62,70.33 61.43,66.14 59.4,66.14 | 67.28,84.17 67.53,83.92 67.53,78.59 | MCU_M:IC1.38 47.34,76.68 47.34,77.44 47.59,77.7 52.67,77.7 52.8,77.57 52.8,76.68 MCU_M:IC1.49 52.8,76.55 v52.8,68.68 | 59.4,66.14 59.4,60.81 58.89,60.3 v54.45,60.3 47.34,67.41 MCU_M:C16.1 | 59.4,66.14 57.88,67.66 57.88,75.54 | 57.88,75.54 57.88,76.55 MCU_M:IC1.59 | 57.88,75.54 63.59,75.54 63.85,75.79 63.85,76.55 MCU_M:IC1.71
  Bottom 0.127: v71.09,96.11 v68.55,96.11 67.91,96.75 v58.26,96.75 | MCU_M:ST_LINK.2 21.18,15.85 21.18,16.23 26.89,21.94 29.05,21.94 54.45,47.34 v54.45,60.3 52.8,61.95 v52.8,68.68
MCU_M:I_BAT  (via drill 0.35)
  Top 0.152: MCU_M:R4.1 58.8,61.7 58.8,63.45 58.78,63.43 v58.78,63.35
  Bottom 0.152: v58.78,63.35 71.85,63.35 87.43,47.77 115.42,47.77 116.52,48.87 116.52,49.37 115.57,50.33 115.57,53.18 115.92,53.54 116.42,53.54 117.75,52.21 117.75,48.87 117.92,48.7 118.66,48.7 v118.9,48.45
MCU_M:I_LOAD
  Top 0.152: MCU_M:R5.2 37.7,87.7 41.8,83.6 MCU_M:IC1.26
MCU_M:I_PV
  Top 0.127: MCU_M:R1.2 33.37,79.86 41.24,79.86 44.04,82.65 44.8,82.65 MCU_M:IC1.28
MCU_M:IS_BATC
  Top 0.127: MCU_M:R4.2 56.74,61.44 54.32,63.85 54.32,67.54 MCU_M:C7.1 54.32,67.66 54.32,76.55 MCU_M:IC1.52
MCU_M:N$20
  Top 0.127: MCU_M:IC1.23 44.8,85.06 41.88,85.06 22.95,103.99 22.95,133.45 28.67,139.16 MCU_M:Q1.2 28.8,139.16 37.43,139.16 MCU_M:C1.1
MCU_M:N$21
  Top 0.127: MCU_M:Q1.1 28.8,134.09 36.67,134.09 37.3,133.45 MCU_M:C2.1
MCU_M:N$22
  Top 0.127: MCU_M:C2.2 39.97,139.04 MCU_M:C1.2
MCU_M:N$27
  Top 0.127: MCU_M:IC1.119 59.4,98.14 59.4,133.83 55.85,137.39 MCU_M:Q2.1
MCU_M:RX
  Top 0.127: MCU_M:IC1.34 44.8,79.6 34.64,79.6 33.88,78.84 32.73,78.84 32.48,79.09 32.48,86.84 32.35,86.97 32.35,88.36 32.1,88.62 30.83,88.62 29.68,87.48 29.68,22.45 27.91,20.67 MCU_M:UART.4
MCU_M:SW_CLK  (via drill 0.3)
  Top 0.127: v54.45,87.35 64.36,97.25 64.36,98.02 MCU_M:IC1.109
  Bottom 0.127: v54.45,87.35 53.56,87.35 22.95,56.74 22.95,25.25 21.18,23.47 MCU_M:ST_LINK.5
MCU_M:SW_DIO  (via drill 0.3)
  Top 0.127: v62.58,94.59 66.26,94.59 MCU_M:IC1.105
  Bottom 0.127: v62.58,94.59 46.45,78.46 45.05,78.46 23.21,56.62 23.21,22.96 21.18,20.93 MCU_M:ST_LINK.4
MCU_M:V_BUS  (via drill 0.35)
  Top 0.127: MCU_M:C3.1 31.84,70.71 31.84,62.58 MCU_M:R3.2
  Top 0.152: MCU_M:C3.1 38.26,77.21 v39.65,77.21 | v43.25,82.97 43.38,83.1 MCU_M:IC1.27
  Bottom 0.152: v39.65,77.21 39.65,79.45 43.25,83.05 v43.25,82.97
MCU_M:VS_BATC
  Top 0.127: 53.81,77.95 53.81,76.68 MCU_M:IC1.51 | 53.81,77.95 53.81,88.49 43.65,98.65 32.48,98.65 31.59,97.76 MCU_M:C5.1 | 53.81,77.95 64.36,77.95 64.86,77.44 64.86,75.79 61.31,72.24 61.31,67.54 MCU_M:R2.2
MCU_S1:5V_REF  (via drill 0.35)
  Top 0.2: v145.6,62.7 SEN101.8 149.1,62.76 149.1,64.85 | v139.45,62.7 138.45,61.7 138.45,54.9 133.55,50 v125.45,50 | VREF102.6 125.49,49.97 v125.45,50 | C114.1 149.1,64.85 | C111.1 v125.45,50 | SEN101.6 151.59,63.66 151,64.25 149.7,64.25 149.1,64.85
  Bottom 0.2: v145.6,62.7 v139.45,62.7 | v125.45,50 125.45,48.1 PIC101.5
MCU_S1:DR_EN
  Bottom 0.2: PIC101.6 126.18,50.58 125.52,51.23 DR101.7
MCU_S1:G1  (via drill 0.35)
  Top 0.2: M101.8 v124.25,55.3
  Bottom 0.2: v124.25,55.3 DR101.1
MCU_S1:G2  (via drill 0.35)
  Top 0.2: M101.3 118.12,52.77 v119.25,53.9
  Bottom 0.2: v119.25,53.9 119.75,54.4 127.35,54.4 128.06,53.7 DR101.5
MCU_S1:ICSPCLK  (via drill 0.35)
  Top 0.2: v123.85,42.15 125.05,43.35 134.75,43.35 136.7,45.3 144.96,45.3 PICKIT100.5
  Bottom 0.2: PIC101.27 123.58,41.87 v123.85,42.15
MCU_S1:ICSPDAT  (via drill 0.35)
  Top 0.2: PICKIT100.4 145.42,47.27 144.5,46.35 136.6,46.35 134.05,43.8 124.15,43.8 v123.15,42.8
  Bottom 0.2: PIC101.28 122.93,42.58 v123.15,42.8
MCU_S1:IS_BAT  (via drill 0.35)
  Top 0.152: v135.6,50.5 134.48,50.5 133.68,49.7 129.52,49.7 126.09,46.27 126.09,44.67 125.91,44.5 125.06,44.5 124.88,44.67 124.88,46.27 122.52,48.63 119.66,48.63 119.43,48.4 118.9,48.4
  Bottom 0.152: 136,49.9 135.6,50.3 v135.6,50.5
  Bottom 0.2: PIC101.2 123.55,48 123.55,47 124.85,45.7 133.5,45.7 135.85,48.05 135.85,49.75 136,49.9 R102.2 137.15,51.15 137.15,51.9 137.5,52.25 C116.1
MCU_S1:LO
  Top 0.127: 142.84,76.7 142.84,79.86 C121.1 142.84,79.98 | 142.84,97.05 L102.2
  Top 2.54: L102.2 140.35,82.83 141.85,81.33 141.85,72.75 143.55,71.05
  pour Top (isolate 0.15, no thermals): 141,76.7 143.15,76.7 144.55,75.3 144.55,61.9 148.25,58.2 150.75,58.2 150.75,56.4 145.45,56.4 144.85,55.8 141,55.8
MCU_S1:MCLR
  Bottom 0.2: PIC101.1 122.93,46.83 124.75,45 134.5,45 PICKIT100.1
MCU_S1:N$2
  Bottom 0.2: C105.1 124.65,60.9 125.55,60 125.55,58.23 DR101.2
MCU_S1:PWM
  Bottom 0.2: DR101.3 126.78,56.27 129.45,53.6 129.45,48.05 PIC101.11
MCU_S1:SW  (via drill 0.35)
  Top 0.127: 124.55,90.52 124.55,97.11 L102.1 | 114.65,66.14 114.77,66.01 114.75,66
  Top 2.54: 123.15,99.9 123.35,99.7 L102.1 123.35,75.57 121.73,73.95 121.73,67.58 121.3,67.15
  Bottom 0.2: DR101.8 v124.25,51.51 v124.25,51.5 | C105.2 v120.35,60.9
  pour Top (isolate 0.15, no thermals): 114.75,70.95 114.75,58 122.15,58 122.15,50.9 133.6,50.9 133.6,70.95
MCU_S1:TX
  Bottom 0.2: PIC101.17 130.07,39.68 130.45,39.3 145.95,39.3 147.96,41.31 UART100.5
MCU_S1:VS_BAT
  Bottom 0.2: C110.1 137.3,58.7 R101.2 134.95,52.65 134.95,48.3 133.05,46.4 124.95,46.4 124.23,47.12 PIC101.3
MCU_S1:VS_BUS
  Bottom 0.2: PIC101.4 124.88,49.18 124.55,49.5 122.95,49.5 120.65,47.2 119.05,47.2 | 119.05,47.2 R103.2 | C109.1 119.05,47.2
N$1  (via drill 0.35)
  Top 0.2: v148.25,55 150.65,55 151.59,55.94 SEN101.3
  Bottom 0.2: R101.1 v148.25,55
  pour Top (isolate 0.15, no thermals): 151.25,58.2 151.25,56.4 156.55,56.4 157.85,55.1 159.95,55.1 161.15,56.3 161.15,58.3 160.05,59.4 157.85,59.4 156.65,58.2
N$2  (via drill 0.35)  (1 unrouted)
  Top 2.54: v43.75,143.25 43.75,146 40.45,149.3
  Bottom 2.54: K1.3 117.67,147.7 43.75,147.7 v43.75,143.25
N$6
  Top 0.152: 101.03,49.08 NM1101.3
  Top 0.2: IDD1101.8 101.03,49.08
  pour Top (isolate 0.15, no thermals): 99.15,47.8 101.15,47.8 101.15,53.1 99.15,53.1
PV
  Top 0.2: IDD1101.11 102.62,47.12 102.25,47.5 100.85,47.5 100.15,46.8 | C6.1 94.83,36.38 94.85,36.4
  pour Top (isolate 0.15, no thermals): 99.15,47.3 101.15,47.3 101.15,45 105.95,40.2 105.95,13.1 102.15,9.3 98.15,9.3 94.45,13 94.45,40.3 99.15,45
PV_BUS  (via drill 0.3, 0.35)
  Top 0.127: C122.1 111.6,79.98 113.76,77.82 113.76,75.41 C101.1 113.89,75.28 113.89,65.5 C103.1 113.76,65.38 113.76,61.19 113,60.43 D102.C 113,60.3 113,59.28 116.93,55.34 117.44,55.34 M101.1 117.44,55.22 117.44,54.08 M101.2 117.44,53.95 117.19,53.95 v116.17,52.93 | v75.53,60.93 74.26,59.66 54.2,59.66 51.4,62.46 33.62,62.46 MCU_M:R3.1 | v96.11,62.46 96.15,62.46
  Top 0.2: 96.61,62.46 96.65,62.5
  Top 2.54: 110.3,125.4 110.45,125.55 v110.45,128.7 110.45,61.95 112.45,59.95
  Bottom 0.127: v116.17,52.93 116.17,50.39 117.19,49.38 117.19,47.22 R103.1 | v75.53,60.93 76.55,60.93 78.07,62.46 v96.11,62.46
  Bottom 2.54: K1.4 142.93,126.15 140.31,123.53 125.24,123.53 119.99,128.77 117.81,128.77 117.74,128.7 v110.45,128.7
  pour Top (isolate 0.15, no thermals): 105.25,53.6 99.15,53.6 99.15,55.9 96.15,58.9 96.15,121.7 99.15,124.7 99.15,127 105.55,127 105.25,126.7
  pour Top (isolate 0.15, no thermals): 114.35,53.4 114.35,133.8 104.95,133.8 104.95,53.4 105.95,52.4 113.35,52.4
  pour Top (isolate 0.15, no thermals): 118.45,55.8 111.05,55.8 111.05,53.6 118.45,53.6
  pour Top (isolate 0.15, no thermals): 118.45,113.5 111.05,113.5 111.05,111.3 118.45,111.3
S$1
  Top 2.54: 226.75,87.1 228.95,89.3 228.95,97.85
S$2
  Top 2.54: 226.85,80.75 234.45,88.35 234.45,99.05 228.9,104.6
SENS_LOAD:5V_REF
  Top 0.2: 93.15,125.19 SEN601.8 | C605.1 C602.1 88.4,126.05 89.05,125.4 90.29,125.4 VREF602.6 92.39,125.46 92.66,125.19 93.15,125.19 | SEN601.6 94.29,127.73 93.75,127.2 93.75,125.79 93.15,125.19
SENS_PV:5V_REF
  Top 0.2: C502.1 C505.1 89.15,52.1 89.49,51.77 VREF502.6 92.7,51.77 | 92.7,51.77 94.68,51.77 SEN501.8 | SEN501.6 93.91,54.04 93.82,53.95 93.8,53.95 93.4,53.55 93.4,52.47 92.7,51.77
TX_RELAY
  Bottom 0.127: 118.4,136.24 118.84,136.24 K1.8
  Bottom 0.254: 118.4,136.24 80.81,136.24 80.18,135.62 63.12,135.62 MCU_M:Q2.2

## Text on the board
tPlace: MPC Celltester V1.0 | MCLR | Kevin Gómez/Juan J. Rojas